# Altium PCB 最小系统1.PcbDoc
Units mil, origin at the board's own origin, x right, y up, seen from the top; angles counter-clockwise.
Board outline 6000 x 4000 mil, 2 copper layers (Top Layer, Bottom Layer); 13 components, 41 nets, 108 pads, 0 vias.
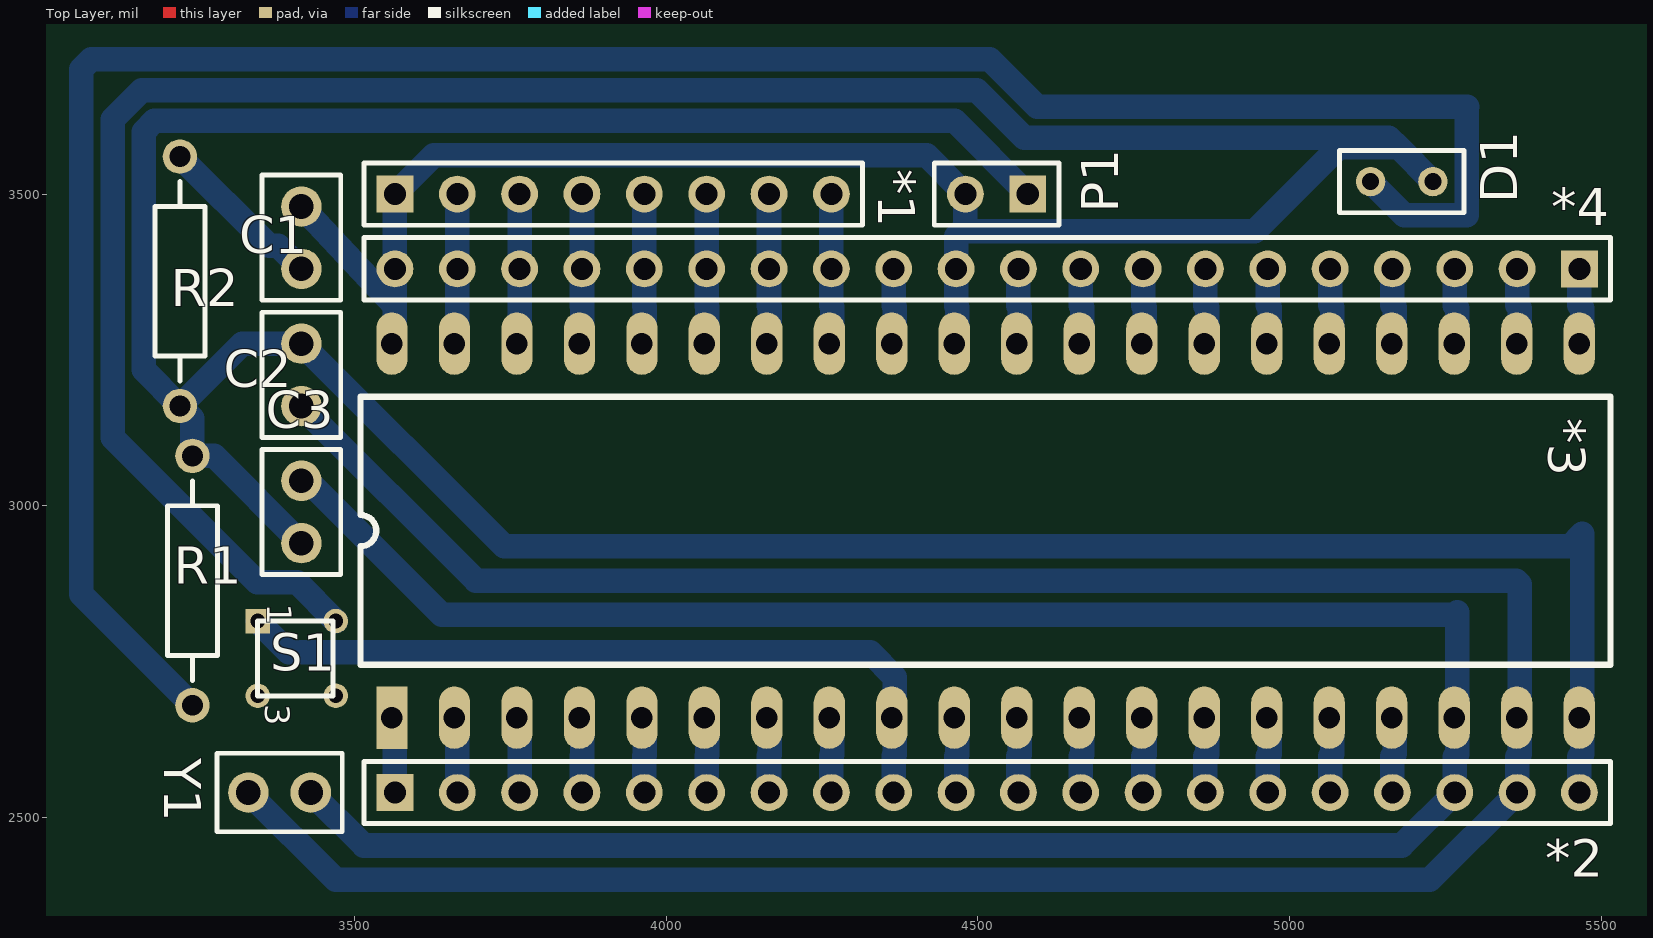
[diagram p0: Top Layer view]
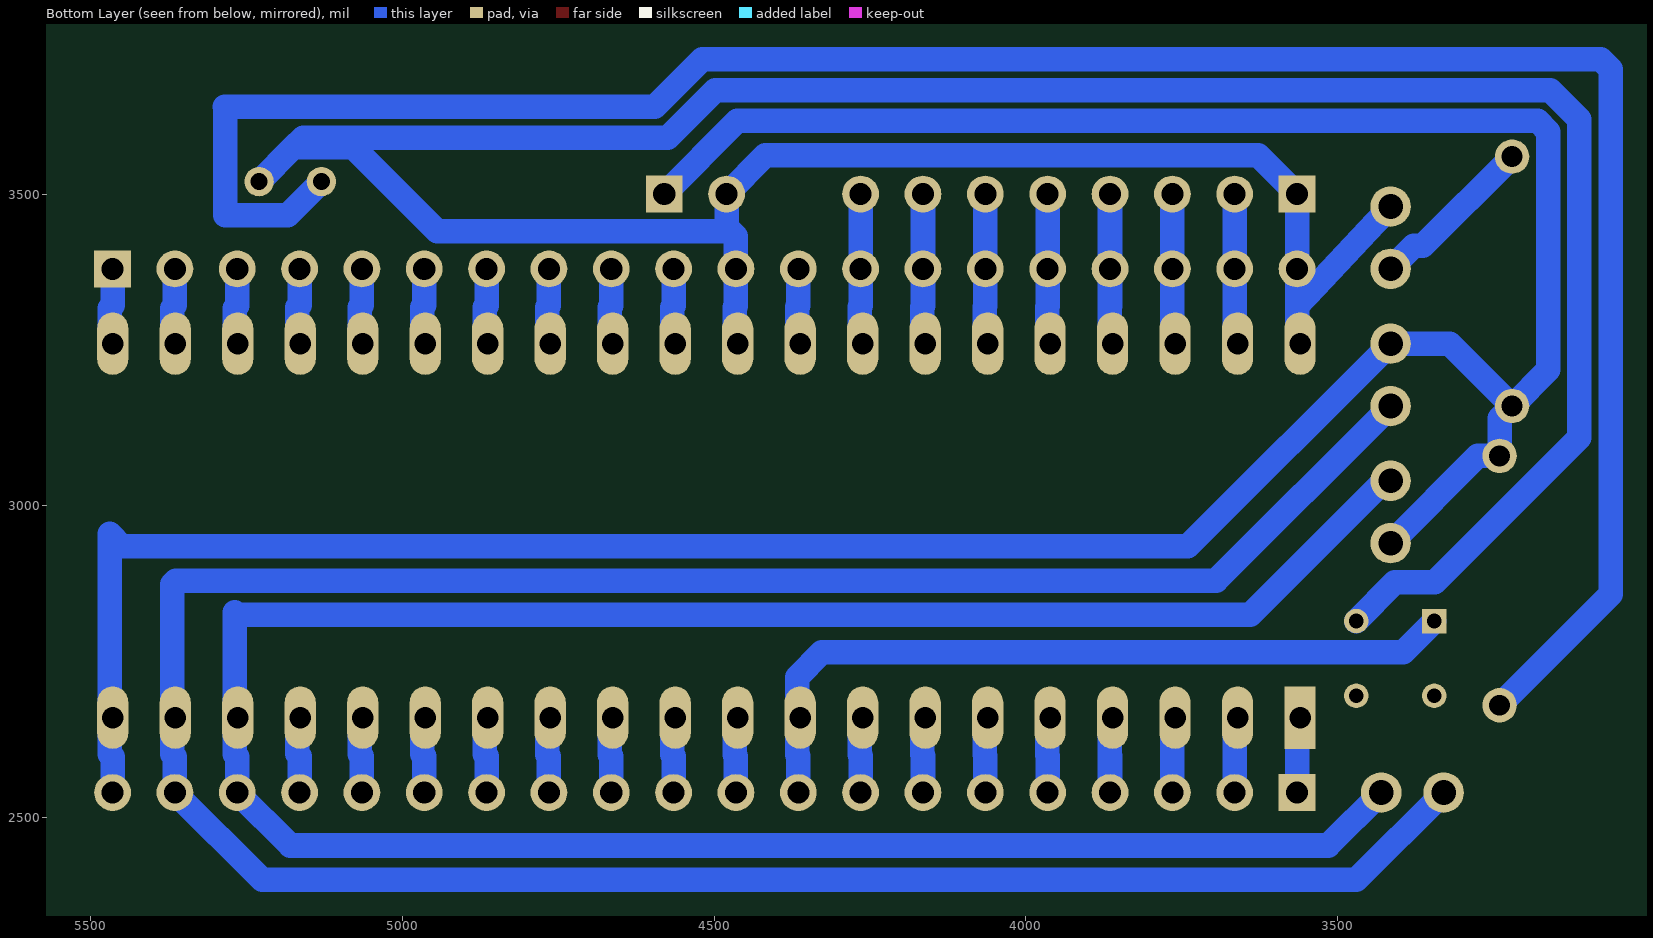
[diagram p1: Bottom Layer view, seen from below]

## Layer stack, top to bottom
Top Layer: signal copper 1.4
Dielectric: dielectric 12.6, FR-4, Dk 4.8
Bottom Layer: signal copper 1.4

## Board outline
1000,1000 7000,1000 7000,5000 1000,5000

## Design rules (kind name [scope] priority, off if disabled: settings)
Clearance [All] p1: gap=10
PolygonConnect [All] p1: connectstyle=Relief reliefconductorwidth=10 reliefentries=4 polygonreliefangle="90 Angle"
RoutingLayers [All] p1: top layer_v5=FALSE bottom layer_v5=TRUE
RoutingVias [All] p1: holewidth=28 width=50 viastyle="Through Hole" minholewidth=28 minwidth=50 maxholewidth=28 maxwidth=50
SilkscreenOverComponentPads [All] p1: minsilkscreentomaskgap=10
SolderMaskExpansion [All] p1: expansion=4
Width [All] p1: maxlimit=39.37 minlimit=39.37 preferedwidth=39.37
26 further rules are at their usual default settings.

## Components (designator, comment, footprint, x,y, rotation, side; value= is the part's Value field where it differs from the comment)
*1 "P0-VCC排阻" HDR1X8 3565,3500 r0 top
*2 "IO扩展1" HDR1X20 3565,2540 r0 top
*3 "STC" DIP403 3560,2660 r90 top
*4 "IO扩展2" HDR1X20 5465,3380 r180 top
C1 "10uf" CAPR2.54-5.1x3.2 3415,3430 r90 top
C2 "Cap" CAPR2.54-5.1x3.2 3415,3210 r270 top
C3 "Cap" CAPR2.54-5.1x3.2 3415,2990 r90 top
D1 "LED0" RAD-0.1 5180,3520 r180 top
P1 "Header 2" HDR1X2 4580,3500 r180 top
R1 "Res" AXIAL-0.4 3240,2880 r90 top
R2 "4.7k" AXIAL-0.4 3220,3360 r90 top
S1 "SW-PB" MHDR2X2 3380,2780 r270 top
Y1 "11.0592MHZ" CAPR2.54-5.1x3.2 3380,2540 r180 top

## Footprints (in the part's own frame and the unit in brackets; to place one, negate y for a bottom-side part, rotate by r counter-clockwise, add the part's x,y. Pads: shape width x height; smd on the part's side, far side on the other; paste and mask are expansions set on the pad)
AXIAL-0.4 [mm] "Axial Device, Thru-Hole; 2 Leads; 0.4 in Pin Spacing"
  round 1.4 hole 0.85: 1(-5.08,0) 2(5.08,0)
  silkscreen extent -4.06,-1.02 4.06,1.02
CAPR2.54-5.1x3.2 [mm] "Capacitor, Ceramic, Thru-Hole, Dipped Radial; Body 5.1 x 3.2 mm (WxT) Pin Spacing 2.54 mm (typ)"
  round 1.65 hole 1: 1(-1.27,0) 2(1.27,0)
  silkscreen extent -2.55,-1.6 2.55,1.6
DIP403 [mil]
  rect 100x50 hole 34.44: 1(0,0)
  oval 100x50 hole 34.44: 2(0,-100.25) 3(0,-200.5) 4(0,-300.75) 5(0,-401) 6(0,-501.25) 7(0,-601.5) 8(0,-701.75) 9(0,-802) 10(0,-902.25) 11(0,-1002.5) 12(0,-1102.75) 13(0,-1203) 14(0,-1303.25) 15(0,-1403.5) 16(0,-1503.75) 17(0,-1604) 18(0,-1704.25) 19(0,-1804.5) 20(0,-1904.75) 21(600,-1904.75) 22(600,-1804.5) 23(600,-1704.25) 24(600,-1604) 25(600,-1503.75) 26(600,-1403.5) 27(600,-1303.25) 28(600,-1203) 29(600,-1102.75) 30(600,-1002.5) 31(600,-902.25) 32(600,-802) 33(600,-701.75) 34(600,-601.5) 35(600,-501.25) 36(600,-401) 37(600,-300.75) 38(600,-200.5) 39(600,-100.25) 40(600,0)
  silkscreen extent 85,-1955 515,50
HDR1X2 [mm] "Connector; Header; 2 Position"
  rect 1.5x1.5 hole 0.9: 1(0,0)
  round 1.5 hole 0.9: 2(2.54,0)
  silkscreen extent -1.27,-1.27 3.81,1.27
HDR1X8 [mm] "Connector; Header; 8 Position"
  rect 1.5x1.5 hole 0.9: 1(0,0)
  round 1.5 hole 0.9: 2(2.54,0) 3(5.08,0) 4(7.62,0) 5(10.16,0) 6(12.7,0) 7(15.24,0) 8(17.78,0)
  silkscreen extent -1.27,-1.27 19.05,1.27
HDR1X20 [mm] "Connector; Header; 20 Position"
  rect 1.5x1.5 hole 0.9: 1(0,0)
  round 1.5 hole 0.9: 2(2.54,0) 3(5.08,0) 4(7.62,0) 5(10.16,0) 6(12.7,0) 7(15.24,0) 8(17.78,0) 9(20.32,0) 10(22.86,0) 11(25.4,0) 12(27.94,0) 13(30.48,0) 14(33.02,0) 15(35.56,0) 16(38.1,0) 17(40.64,0) 18(43.18,0) 19(45.72,0) 20(48.26,0)
  silkscreen extent -1.27,-1.27 49.53,1.27
MHDR2X2 [mm] "Connector; Header; 2x2 Position"
  rect 1x1 hole 0.6: 1(-0.889,-0.889)
  round 1 hole 0.6: 2(-0.889,2.286) 3(2.159,-0.889) 4(2.159,2.286)
  silkscreen extent -0.9,-0.9 2.17,2.17
RAD-0.1 [mm] "Radial Cap, Thru-Hole; 2 Leads; 0.1 in Pin Spacing"
  round 1.2 hole 0.7: 1(-1.27,0) 2(1.27,0)
  silkscreen extent -2.54,-1.27 2.54,1.27

## Part data
C1: library part "Cap Pol"
P1: "Header, 2-Pin"
R1: "Resistor"
R2: library part Res2
S1: "Switch"
Y1: library part XTAL, "Crystal Oscillator"

## Nets (pads, with @x,y where several pads share a name; then routed paths per layer and width w, separated by ;. In a path a pad name is that pad's centre, name@x,y a point inside that pad or via, vN(x,y) a via of type N, cw(c..) or ccw(c..) an arc to the next point about the centre after c; other vN are vias at no path point)
GND: *2.20 *3.20 C2.1 C3.1 P1.1 R1.2 R2.1 | length 5109.7
  Bottom Layer w39.37: C3.1 3275,3080 R1.2 3240,3140 R2.1 ; P1.1 4462.76,3617.24 3179.24,3617.24 3162,3600 3162,3218 R2.1 ; *2.20 5465,2597 5469.75,2601.75 5469.75,2954.75 5450,2935 3740,2935 C2.1 3320,3260 R2.1
Net*2_1: *2.1 *3.1 | length 120
  Bottom Layer w39.37: *2.1 *3.1@3565,2660
Net*2_2: *2.2 *3.2 | length 120.1
  Bottom Layer w39.37: *2.2 3665,2599 3665.25,2599.25 *3.2@3665.25,2660
Net*2_3: *2.3 *3.3 | length 120.2
  Bottom Layer w39.37: *2.3 3765,2599 3765.5,2599.5 *3.3@3765.5,2660
Net*2_4: *2.4 *3.4 | length 120.3
  Bottom Layer w39.37: *2.4 3865,2599 3865.75,2599.75 *3.4@3865.75,2660
Net*2_5: *2.5 *3.5 | length 120.4
  Bottom Layer w39.37: *2.5 3965,2599 3966,2600 *3.5@3966,2660
Net*2_6: *2.6 *3.6 | length 120.5
  Bottom Layer w39.37: *2.6 4065,2599 4066.25,2600.25 *3.6@4066.25,2660
Net*2_7: *2.7 *3.7 | length 120.6
  Bottom Layer w39.37: *2.7 4165,2599 4166.5,2600.5 *3.7@4166.5,2660
Net*2_8: *2.8 *3.8 | length 120.7
  Bottom Layer w39.37: *2.8 4265,2599 4266.75,2600.75 *3.8@4266.75,2660
Net*2_10: *2.10 *3.10 | length 120.9
  Bottom Layer w39.37: *2.10 4465,2598 4467.25,2600.25 *3.10@4467.25,2660
Net*2_11: *2.11 *3.11 | length 121
  Bottom Layer w39.37: *2.11 4565,2598 4567.5,2600.5 *3.11@4567.5,2660
Net*2_12: *2.12 *3.12 | length 121.1
  Bottom Layer w39.37: *2.12 4665,2598 4667.75,2600.75 *3.12@4667.75,2660
Net*2_13: *2.13 *3.13 | length 121.2
  Bottom Layer w39.37: *2.13 4765,2598 4768,2601 *3.13@4768,2660
Net*2_14: *2.14 *3.14 | length 121.3
  Bottom Layer w39.37: *2.14 4865,2598 4868.25,2601.25 *3.14@4868.25,2660
Net*2_15: *2.15 *3.15 | length 121.4
  Bottom Layer w39.37: *2.15 4965,2598 4968.5,2601.5 *3.15@4968.5,2660
Net*2_16: *2.16 *3.16 | length 121.6
  Bottom Layer w39.37: *2.16 5065,2598 5068.75,2601.75 *3.16@5068.75,2660
Net*2_17: *2.17 *3.17 | length 121.7
  Bottom Layer w39.37: *2.17 5165,2598 5169,2602 *3.17@5169,2660
Net*3_21: *3.21 *4.1 | length 122
  Bottom Layer w39.37: *4.1 5465,3321.75 5469.75,3317 *3.21@5469.75,3260
Net*3_22: *3.22 *4.2 | length 121.9
  Bottom Layer w39.37: *4.2 5365,3321.5 5369.5,3317 *3.22@5369.5,3260
Net*3_23: *3.23 *4.3 | length 121.8
  Bottom Layer w39.37: *4.3 5265,3321.25 5269.25,3317 *3.23@5269.25,3260
Net*3_24: *3.24 *4.4 | length 121.7
  Bottom Layer w39.37: *4.4 5165,3322 5169,3318 *3.24@5169,3260
Net*3_25: *3.25 *4.5 | length 121.6
  Bottom Layer w39.37: *4.5 5065,3321.75 5068.75,3318 *3.25@5068.75,3260
Net*3_26: *3.26 *4.6 | length 121.4
  Bottom Layer w39.37: *4.6 4965,3321.5 4968.5,3318 *3.26@4968.5,3260
Net*3_27: *3.27 *4.7 | length 121.3
  Bottom Layer w39.37: *4.7 4865,3321.25 4868.25,3318 *3.27@4868.25,3260
Net*3_28: *3.28 *4.8 | length 121.2
  Bottom Layer w39.37: *4.8 4765,3321 4768,3318 *3.28@4768,3260
Net*3_29: *3.29 *4.9 | length 121.1
  Bottom Layer w39.37: *4.9 4665,3320.75 4667.75,3318 *3.29@4667.75,3260
Net*3_30: *3.30 *4.10 | length 121
  Bottom Layer w39.37: *4.10 4565,3320.5 4567.5,3318 *3.30@4567.5,3260
NetC1_1: C1.1 R2.2 | length 269.6
  Bottom Layer w39.37: R2.2 3363,3417 3378,3417 C1.1
NetD1_2: D1.2 R1.1 | length 3705.6
  Bottom Layer w39.37: R1.1 3062,2858 3062,3700 3077.98,3715.98 4519.02,3715.98 4595,3640 5285,3640 5284,3639 5284,3466 5184,3466 D1.2
P0.0: *1.2 *3.39 *4.19 | length 240.1
  Bottom Layer w39.37: *1.2 *4.19 3665,3319.25 3665.25,3319 *3.39@3665.25,3260
P0.1: *1.3 *3.38 *4.18 | length 240.2
  Bottom Layer w39.37: *1.3 *4.18 3765,3319.5 3765.5,3319 *3.38@3765.5,3260
P0.2: *1.4 *3.37 *4.17 | length 240.3
  Bottom Layer w39.37: *1.4 *4.17 3865,3319.75 3865.75,3319 *3.37@3865.75,3260
P0.3: *1.5 *3.36 *4.16 | length 240.4
  Bottom Layer w39.37: *1.5 *4.16 3965,3320 3966,3319 *3.36@3966,3260
P0.4: *1.6 *3.35 *4.15 | length 240.5
  Bottom Layer w39.37: *1.6 *4.15 4065,3320.25 4066.25,3319 *3.35@4066.25,3260
P0.5: *1.7 *3.34 *4.14 | length 240.6
  Bottom Layer w39.37: *1.7 *4.14 4165,3320.5 4166.5,3319 *3.34@4166.5,3260
P0.6: *1.8 *3.33 *4.13 | length 240.7
  Bottom Layer w39.37: *1.8 *4.13 4265,3320.75 4266.75,3319 *3.33@4266.75,3260
P0.7: *3.32 *4.12 | length 120.8
  Bottom Layer w39.37: *4.12 4365,3321 4367,3319 *3.32@4367,3260
RST: *2.9 *3.9 S1.1 | length 1245.1
  Bottom Layer w39.37: S1.1 3395,2765 4327,2765 4367,2725 4367,2660 4367,2601 4365,2599 *2.9
VCC: *1.1 *3.31 *3.40 *4.11 *4.20 C1.2 D1.1 P1.2 S1.2 | length 5619.4
  Bottom Layer w39.37: C1.2 3535.06,3351.93 3565,3320 ; S1.2 3408,2877 3344,2877 3112,3109 3112,3619.82 3158.79,3666.61 4498.57,3666.61 4574.55,3590.63 5159.37,3590.63 5175,3575 ; *3.40@3565,3260 3565,3320 ; *3.31@4467.25,3260 4467.25,3318 4465,3320.25 *4.11 4465,3432 4480,3447 ; D1.1 5175,3575 ; 3565,3320 *4.20 *1.1 3626.89,3561.89 4418.11,3561.89 P1.2 4480,3447 ; 4480,3447 4480,3440 4944,3440 5079,3575 5175,3575
XTAL1: *2.19 *3.19 C2.2 Y1.2 | length 4559.8
  Bottom Layer w39.37: Y1.2 3470,2400 5225,2400 *2.19 5365,2597 5369.5,2601.5 5369.5,2874.02 5363.52,2880 3695,2880 C2.2
XTAL2: *2.18 *3.18 C3.2 Y1.1 | length 4141.5
  Bottom Layer w39.37: C3.2 3425,3040 3640,2825 5265,2825 5269.25,2829.25 5269.25,2601.25 5265,2597 *2.18 5180,2455 3515,2455 Y1.1
pads on no net: S1.3 S1.4

## Text inside footprints (layer, text, board x,y; h text height)
S1: Top Overlay "1" at 3360,2842.99 h39.37 r270; Top Overlay "3" at 3357.26,2681.57 h39.37 r270